# Altium PCB Glucometer-I.C.- Mis 2.PcbDoc
Units mm, origin at the board's own origin, x right, y up, seen from the top; angles counter-clockwise.
Board outline 21.11 x 16.1 mm, 2 copper layers (Top Layer, Bottom Layer); 3 components, 16 nets, 32 pads, 0 vias.
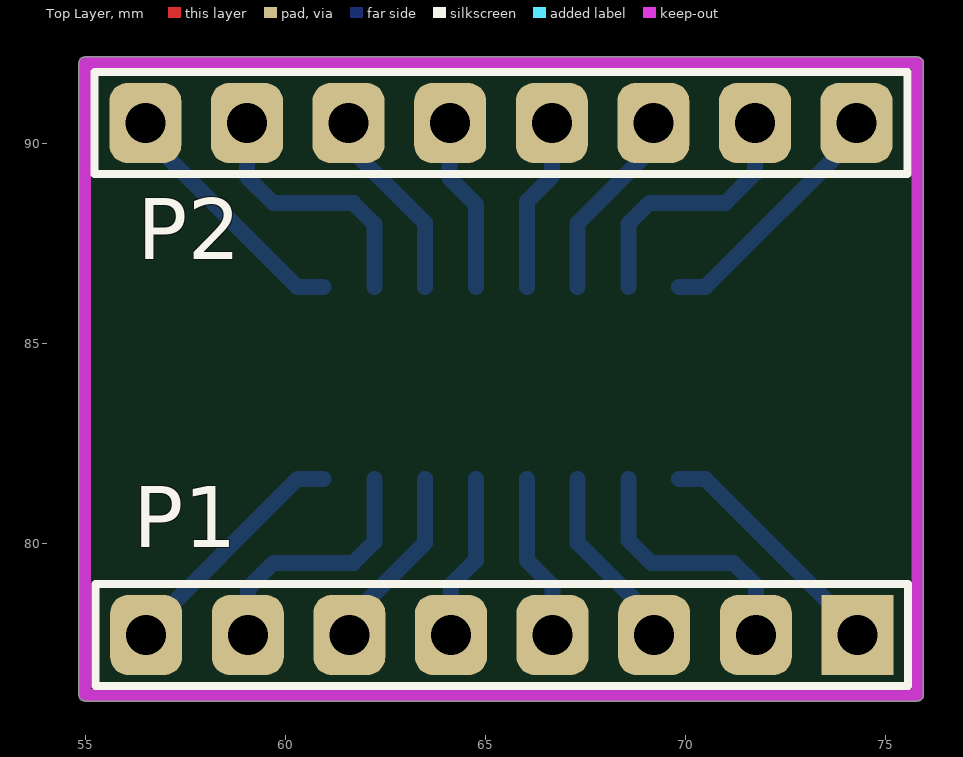
[diagram p0: Top Layer view]
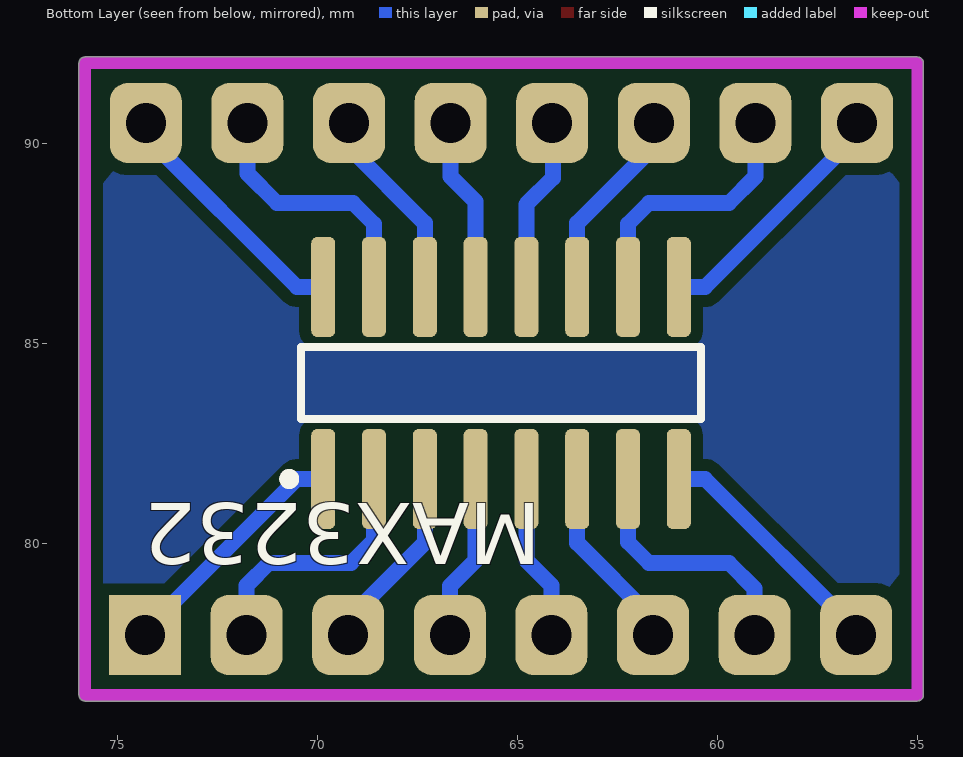
[diagram p1: Bottom Layer view, seen from below]

## Layer stack, top to bottom
Top Layer: signal copper 0.0356
Dielectric: dielectric 0.32, FR-4, Dk 4.8
Bottom Layer: signal copper 0.0356

## Board outline
54.991,76.05 cw(c54.991,76.2) 54.841,76.2 54.841,92 cw(c54.991,92) 54.991,92.15 75.8,92.15 cw(c75.8,92) 75.95,92 75.95,76.2 cw(c75.8,76.2) 75.8,76.05

## Design rules (kind name [scope] priority, off if disabled: settings)
Clearance [All] p1: gap=0.25
PolygonConnect [All] p1: connectstyle=Relief reliefconductorwidth=0.254 reliefentries=4 polygonreliefangle="90 Angle" airgapwidth=0.254
RoutingVias [All] p1: holewidth=5 width=5 viastyle="Through Hole" minholewidth=0.711 minwidth=1.27 maxholewidth=0.711 maxwidth=1.27
SolderMaskExpansion [All] p1: expansion=0.102
Width [All] p1: maxlimit=5 minlimit=0.25 preferedwidth=0.4 minimp=50.000000 maximp=50.000000 favimp=50.000000
28 further rules are at their usual default settings.

## Classes and differential pairs
component class "Glucometer-I.C.- Mis 2": MAX3232

## Components (designator, comment, footprint, x,y, rotation, side; value= is the part's Value field where it differs from the comment)
MAX3232 "MAX3232CSE" NSO16_N 65.4,84 r90 bottom
P1 "Header 8" HDR1X8#1 74.3,77.7 r180 top
P2 "Header 8" HDR1X8#2 56.5,90.5 r0 top

## Footprints (in the part's own frame and the unit in brackets; to place one, negate y for a bottom-side part, rotate by r counter-clockwise, add the part's x,y. Pads: shape width x height; smd on the part's side, far side on the other; paste and mask are expansions set on the pad)
HDR1X8#1 [mm] "Connector; Header; 8 Position"
  rect 1.8x2 hole 1: 1(0,0)
  rrect50% 1.8x2 hole 1: 2(2.54,0) 3(5.08,0) 4(7.62,0) 5(10.16,0) 6(12.7,0) 7(15.24,0) 8(17.78,0)
  silkscreen extent -1.27,-1.27 19.05,1.27
HDR1X8#2 [mm] "Connector; Header; 8 Position"
  rrect50% 1.8x2 hole 1: 1(0,0) 2(2.54,0) 3(5.08,0) 4(7.62,0) 5(10.16,0) 6(12.7,0) 7(15.24,0) 8(17.78,0)
  silkscreen extent -1.27,-1.27 19.05,1.27
NSO16_N [mm] "SOIC, 16-Leads, Body 9.9x3.9mm, Pitch 1.27mm, IPC Medium Density"
  rrect50% 2.5x0.6 smd: 1(-2.4,4.445) 2(-2.4,3.175) 3(-2.4,1.905) 4(-2.4,0.635) 5(-2.4,-0.635) 6(-2.4,-1.905) 7(-2.4,-3.175) 8(-2.4,-4.445) 9(2.4,-4.445) 10(2.4,-3.175) 11(2.4,-1.905) 12(2.4,-0.635) 13(2.4,0.635) 14(2.4,1.905) 15(2.4,3.175) 16(2.4,4.445)
  silkscreen extent -2.52,-5 0.9,5.42, body extent -2,-5 2,5, height 1.75

## Part data
MAX3232: "3.0V TO 5.5V, Low-Power, up to 1Mbps, True RS-232 Transceiver Using Four 0.1µF External Capacitor"
P1 P2: "Header, 8-Pin"

## Nets (pads, with @x,y where several pads share a name; then routed paths per layer and width w, separated by ;. In a path a pad name is that pad's centre, name@x,y a point inside that pad or via, vN(x,y) a via of type N, cw(c..) or ccw(c..) an arc to the next point about the centre after c; other vN are vias at no path point)
M1: MAX3232.1 P1.1 | length 6.1
  Bottom Layer w0.254: P1.1 P1.1@74.3,77.8
  Bottom Layer w0.4: MAX3232.1 70.5,81.6 P1.1@74.3,77.8
M2: MAX3232.2 P1.2 | length 6.4
  Bottom Layer w0.4: MAX3232.2 68.575,80.075 69.15,79.5 71.2,79.5 71.76,78.94 P1.2
M3: MAX3232.3 P1.3 | length 4.7
  Bottom Layer w0.254: P1.3 P1.3@69.22,78.09
  Bottom Layer w0.4: MAX3232.3 67.305,80.005 P1.3@69.22,78.09
M4: MAX3232.4 P1.4 | length 4.2
  Bottom Layer w0.4: MAX3232.4 66.035,79.565 66.68,78.92 P1.4
M5: MAX3232.5 P1.5 | length 4.2
  Bottom Layer w0.4: P1.5 64.14,78.94 64.765,79.565 MAX3232.5
M6: MAX3232.6 P1.6 | length 4.7
  Bottom Layer w0.254: P1.6 P1.6@61.6,78.11
  Bottom Layer w0.4: P1.6@61.6,78.11 63.495,80.005 MAX3232.6
M7: MAX3232.7 P1.7 | length 6.4
  Bottom Layer w0.4: P1.7 59.06,78.86 59.7,79.5 61.7,79.5 62.225,80.025 MAX3232.7
M8: MAX3232.8 P1.8 | length 6.1
  Bottom Layer w0.254: P1.8 P1.8@56.52,77.82
  Bottom Layer w0.4: P1.8@56.52,77.82 60.3,81.6 MAX3232.8
M9: MAX3232.9 P2.1 | length 6.3
  Bottom Layer w0.254: P2.1@56.5,90.2 P2.1
  Bottom Layer w0.4: P2.1@56.5,90.2 60.3,86.4 MAX3232.9
M10: MAX3232.10 P2.2 | length 6.6
  Bottom Layer w0.4: P2.2 59.04,89.16 59.7,88.5 61.7,88.5 62.225,87.975 MAX3232.10
M11: MAX3232.11 P2.3 | length 4.9
  Bottom Layer w0.254: P2.3@61.58,89.91 P2.3
  Bottom Layer w0.4: P2.3@61.58,89.91 63.495,87.995 MAX3232.11
M12: MAX3232.12 P2.4 | length 4.4
  Bottom Layer w0.254: P2.4@64.1,90.48 P2.4
  Bottom Layer w0.4: P2.4@64.1,90.48 64.1,89.13 64.765,88.465 MAX3232.12
M13: MAX3232.13 P2.5 | length 4.4
  Bottom Layer w0.4: MAX3232.13 66.035,88.535 66.66,89.16 P2.5
M14: MAX3232.14 P2.6 | length 4.3
  Bottom Layer w0.4: MAX3232.14 67.305,87.995 P2.6@69.2,89.89
M15: MAX3232.15 P2.7 | length 6.5
  Bottom Layer w0.4: MAX3232.15 68.575,87.975 69.1,88.5 71,88.5 71.74,89.24 P2.7
M16: MAX3232.16 P2.8 | length 6.3
  Bottom Layer w0.254: P2.8@74.28,90.18 P2.8
  Bottom Layer w0.4: MAX3232.16 70.5,86.4 P2.8@74.28,90.18

## Polygon pours and split planes (outlines as drawn)
no net on Bottom Layer "Bottom Layer-No Net" (solid, pour order 2): 54.991,91.9 55.039,91.948 75.8,91.948 75.8,76.2 54.991,76.2

## Keep-outs
Keep-Out Layer:
  lines w0.3: 54.991,76.2 54.991,92 75.8,92 75.8,76.2 54.991,76.2

## Dimensions
74.295,90.424 to 74.295,77.724 on Top Overlay
54.991,76.2 to 54.991,92 on Mechanical 1
54.991,76.2 to 75.8,76.2 on Mechanical 1